# EAGLE board Macro_Pad_v12 (EAGLE 9.7.0)
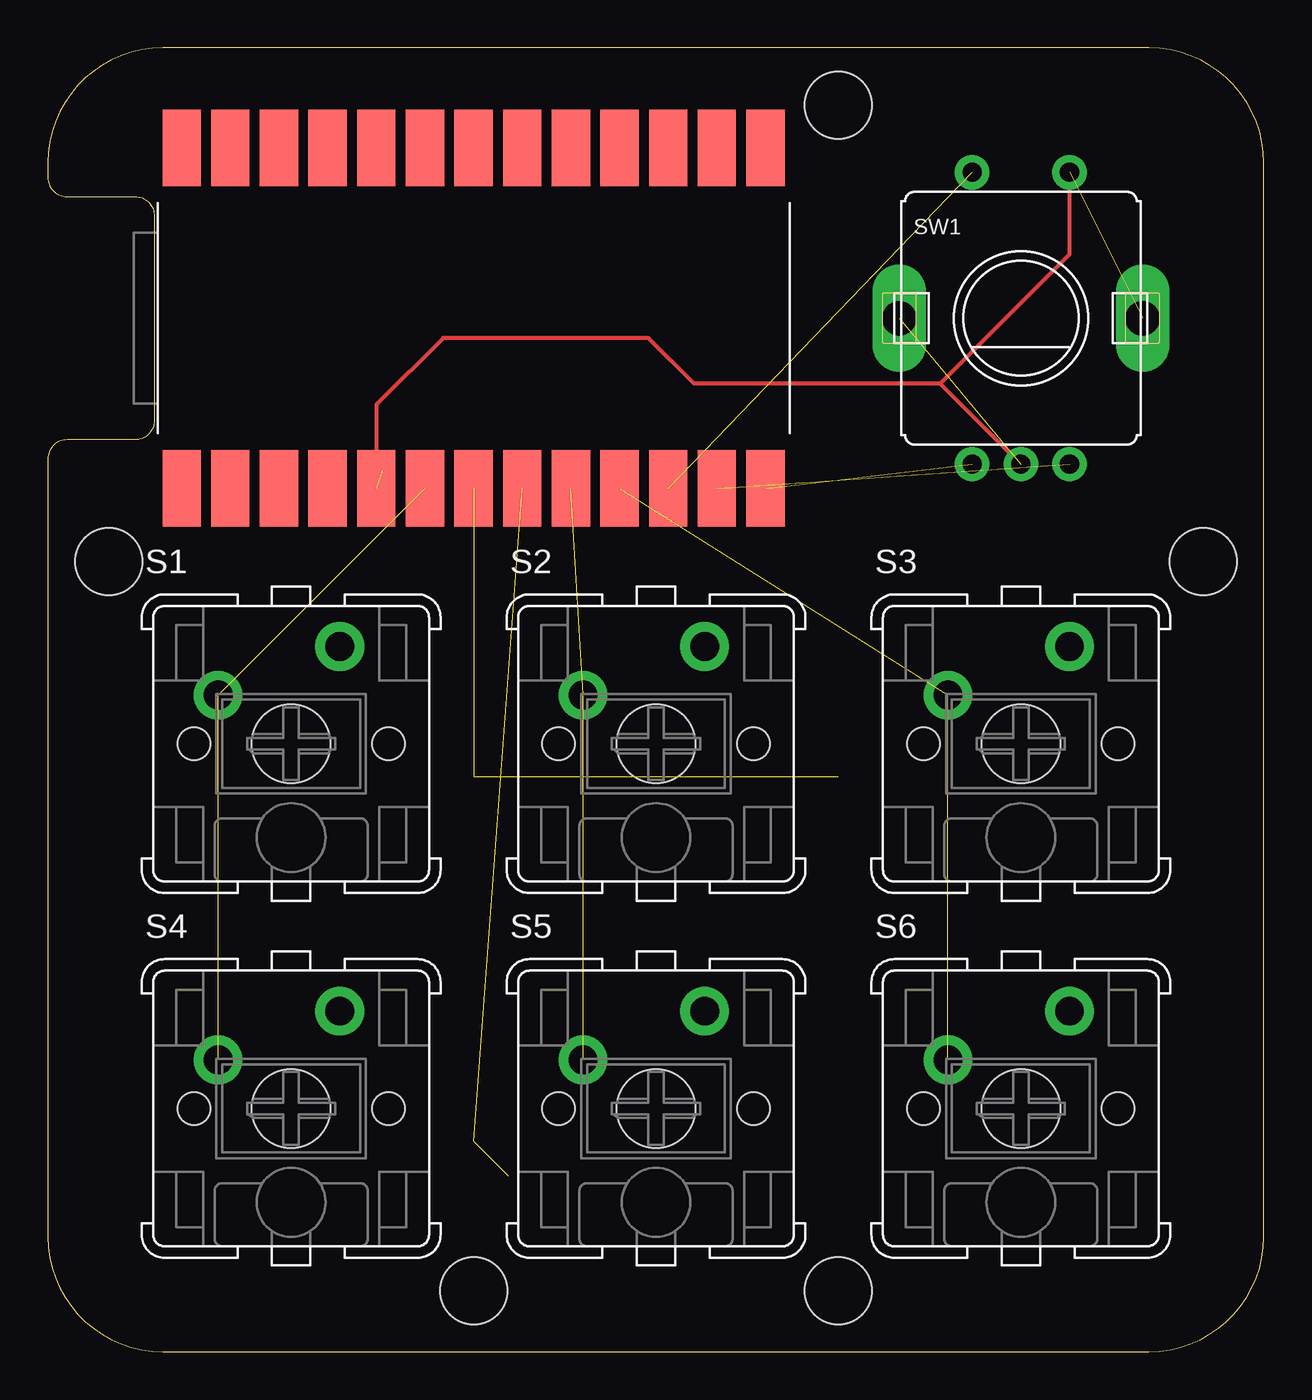
[diagram p0: board, top side]
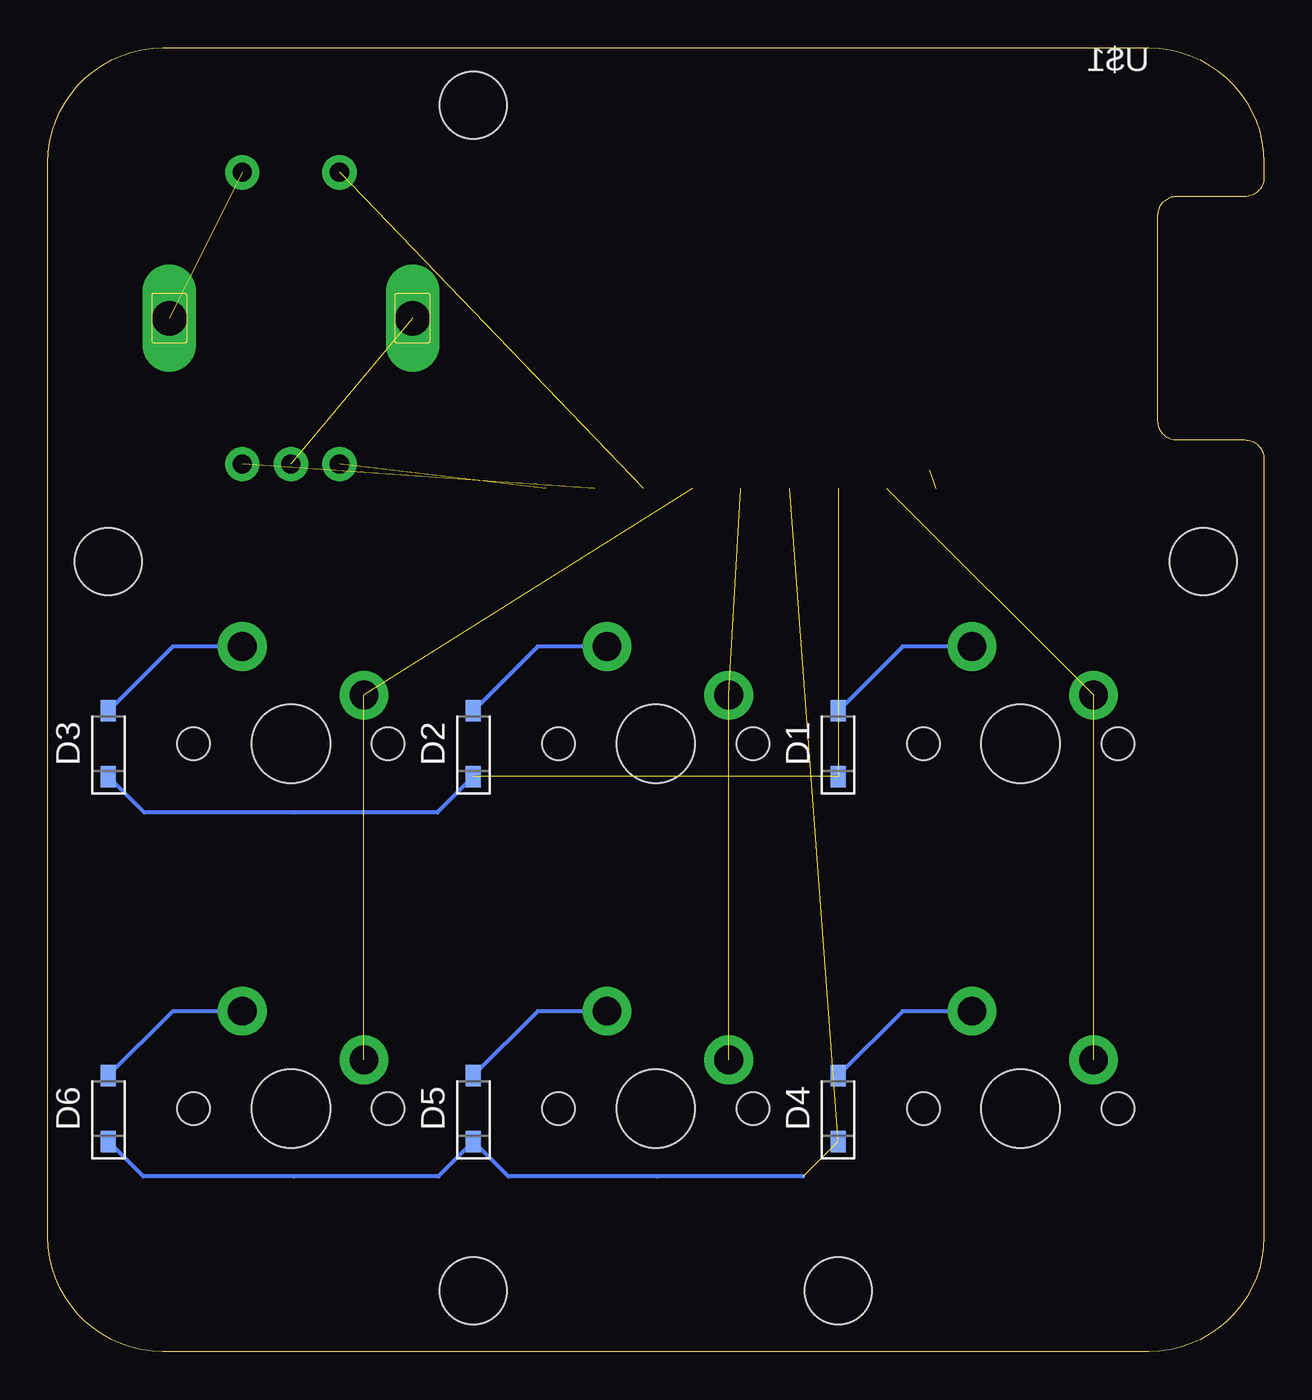
[diagram p1: board, bottom side, seen from below]

Size 63.49 x 68.09 mm. Coordinates in mm from the lower left corner, seen from the top.
Outline: 0,62.09 0,61.32 arc90 1,60.32 4.56,60.32 arc-90 5.56,59.32 5.56,48.62 arc-90 4.56,47.62 1,47.62 arc90 0,46.62 0,6 arc90 6,0 57.49,0 arc90 63.49,6 63.49,62.09 arc90 57.49,68.09 6,68.09 arc90 0,62.09
Copper layers (1*16): Top / Bottom
Stack-up Default Layer Stack: Top User Defined 0.035mm / Dielectric-1 User Defined 1.5mm / Bottom User Defined 0.035mm
Design rules: minimum copper width 6mil, minimum drill size 0.35mm, copper clearance wire_polygon to wire_polygon 6mil, copper clearance wire_polygon to pad_smd 6mil, copper clearance wire_polygon to via 6mil, copper clearance pad_smd to pad_smd 6mil, copper clearance pad_smd to via 6mil, copper clearance via to via 6mil, copper clearance smd to pad (same net) 6mil, copper clearance smd to via (same net) 6mil, copper clearance smd to smd (same net) 6mil, dimension clearance 40mil, restrict clearance 0mil, drill distance 6mil, keepout clearance 0mil
Holes 3.5 mm at 22.23,3.18 41.27,3.18 60.32,41.27 3.18,41.27 41.27,65.09

## Footprints (pad centres in the part's own frame; a part is rotated, then mirrored left to right if it is on the bottom)
SOD3715X135 = smd 1.127 x 0.784: 1 -1.722,0; 2 1.722,0
CHERRY_CHERRY_MX = drill 1.5 pad 2.54: S1 -3.81,2.54; S2 2.54,5.08 | hole 1.7: -5.08,0; 5.08,0 | hole 4.1: 0,0
ADAFRUIT-MACROPAD-2040_ADAFRUIT_ELECTROMECH_PEC11+SWITCH = drill 1 pad 1.8: P$1 -2.54,7.62; P$2 2.54,7.62; P$A -2.54,-7.62; P$B 2.54,-7.62; P$C 0,-7.62 | drill 1.8 pad 2.8 long: P$GND1 -6.35,0; P$GND2 6.35,0
ADAFRUIT-KB2040_KB2040_SMD = smd 2 x 4: 1 -15.24,-8.89; 2 -12.7,-8.89; 3 -10.16,-8.89; 4 -7.62,-8.89; 5 -5.08,-8.89; 6 -2.54,-8.89; 7 0,-8.89; 8 2.54,-8.89; 9 5.08,-8.89; 10 7.62,-8.89; 11 10.16,-8.89; 12 12.7,-8.89; 13 15.24,-8.89; 14 15.24,8.89; 15 12.7,8.89; 16 10.16,8.89; 17 7.62,8.89; 18 5.08,8.89; 19 2.54,8.89; 20 0,8.89; 21 -2.54,8.89; 22 -5.08,8.89; 23 -7.62,8.89; 24 -10.16,8.89; 25 -12.7,8.89; 26 -15.24,8.89

## Placement (x,y rotation side)
D1  1N4148W  [SOD3715X135]  22.23,31.75 90 bottom
D2  1N4148W  [SOD3715X135]  41.27,31.75 90 bottom
D3  1N4148W  [SOD3715X135]  60.32,31.75 90 bottom
D4  1N4148W  [SOD3715X135]  22.23,12.7 90 bottom
D5  1N4148W  [SOD3715X135]  41.27,12.7 90 bottom
D6  1N4148W  [SOD3715X135]  60.32,12.7 90 bottom
S1  CHERRY_CHERRY_MX  [CHERRY_CHERRY_MX]  12.7,31.75 0 top
S2  CHERRY_CHERRY_MX  [CHERRY_CHERRY_MX]  31.75,31.75 0 top
S3  CHERRY_CHERRY_MX  [CHERRY_CHERRY_MX]  50.8,31.75 0 top
S4  CHERRY_CHERRY_MX  [CHERRY_CHERRY_MX]  12.7,12.7 0 top
S5  CHERRY_CHERRY_MX  [CHERRY_CHERRY_MX]  31.75,12.7 0 top
S6  CHERRY_CHERRY_MX  [CHERRY_CHERRY_MX]  50.8,12.7 0 top
SW1  [ADAFRUIT-MACROPAD-2040_ADAFRUIT_ELECTROMECH_PEC11+SWITCH]  50.8,53.98 0 top
U$1  ADAFRUIT-KB2040_KB2040  [ADAFRUIT-KB2040_KB2040_SMD]  22.23,53.98 0 top

## Library data of the parts
D1-D6 = Diode; CATEGORY: Diode; DESCRIPTION: DIODE GEN PURP 100V 300MA SOD123; MANUFACTURER: Diodes Incorporated; SUB-CATEGORY: Rectifier
S1-S6 = Ocreeb 12; FARNELL: 2292961; MOUSER: 540-MX1A-11NW
SW1 U$1 = Ocreeb 12

## Nets
A: SW1.P$A U$1.13
B: SW1.P$B U$1.12
COL1: S1.S1 S4.S1 U$1.6
COL2: S2.S1 S5.S1 U$1.9
COL3: S3.S1 S6.S1 U$1.10
GND: SW1.P$2 SW1.P$C SW1.P$GND1 SW1.P$GND2 U$1.5
N$6: D2.2 S2.S2
N$7: D1.2 S1.S2
N$8: D3.2 S3.S2
N$9: D6.2 S6.S2
N$10: D5.2 S5.S2
N$11: D4.2 S4.S2
ROW1: D1.1 D2.1 D3.1 U$1.7
ROW2: D4.1 D5.1 D6.1 U$1.8
SW: SW1.P$1 U$1.11

## Tracks (layer width: path | path; a pad name or v marks a point on that pad's centre or on a via)
A  (1 unrouted)
B  (1 unrouted)
COL1  (2 unrouted)
COL2  (2 unrouted)
COL3  (2 unrouted)
GND  (3 unrouted)
  Top 0.203: SW1.P$C 46.59,50.56 | 46.59,50.56 33.74,50.56 31.36,52.94 20.64,52.94 17.15,49.45 17.15,47.62 17.15,46.35 17.46,46.04 | 46.59,50.56 53.34,57.31 SW1.P$2
N$6
  Bottom 0.203: S2.S2 37.92,36.83 D2.2
N$7
  Bottom 0.203: S1.S2 18.87,36.83 D1.2
N$8
  Bottom 0.203: S3.S2 56.97,36.83 D3.2
N$9
  Bottom 0.203: S6.S2 56.97,17.78 D6.2
N$10
  Bottom 0.203: S5.S2 37.92,17.78 D5.2
N$11
  Bottom 0.203: S4.S2 18.87,17.78 D4.2
ROW1  (2 unrouted)
  Bottom 0.203: D2.1 43.15,28.15 50.65,28.15 58.45,28.15 D3.1
ROW2  (2 unrouted)
  Bottom 0.203: 24.05,9.15 31.65,9.15 39.45,9.15 D5.1 43.1,9.15 50.65,9.15 58.5,9.15 D6.1
SW  (1 unrouted)